# Altium PCB CFD_Chip_Test_v9_forgotOneTermination.PcbDoc (part 2 of 2)
Units mil, origin at the board's own origin, x right, y up, seen from the top; angles counter-clockwise.
Board outline 3410 x 4065 mil, 4 copper layers (Top Layer, Top Plane, Bottom Plane, Bottom Layer), stack 61.356 mil thick; 123 components, 109 nets, 496 pads, 105 vias.
Unrouted connection lines stored in the file: 16.
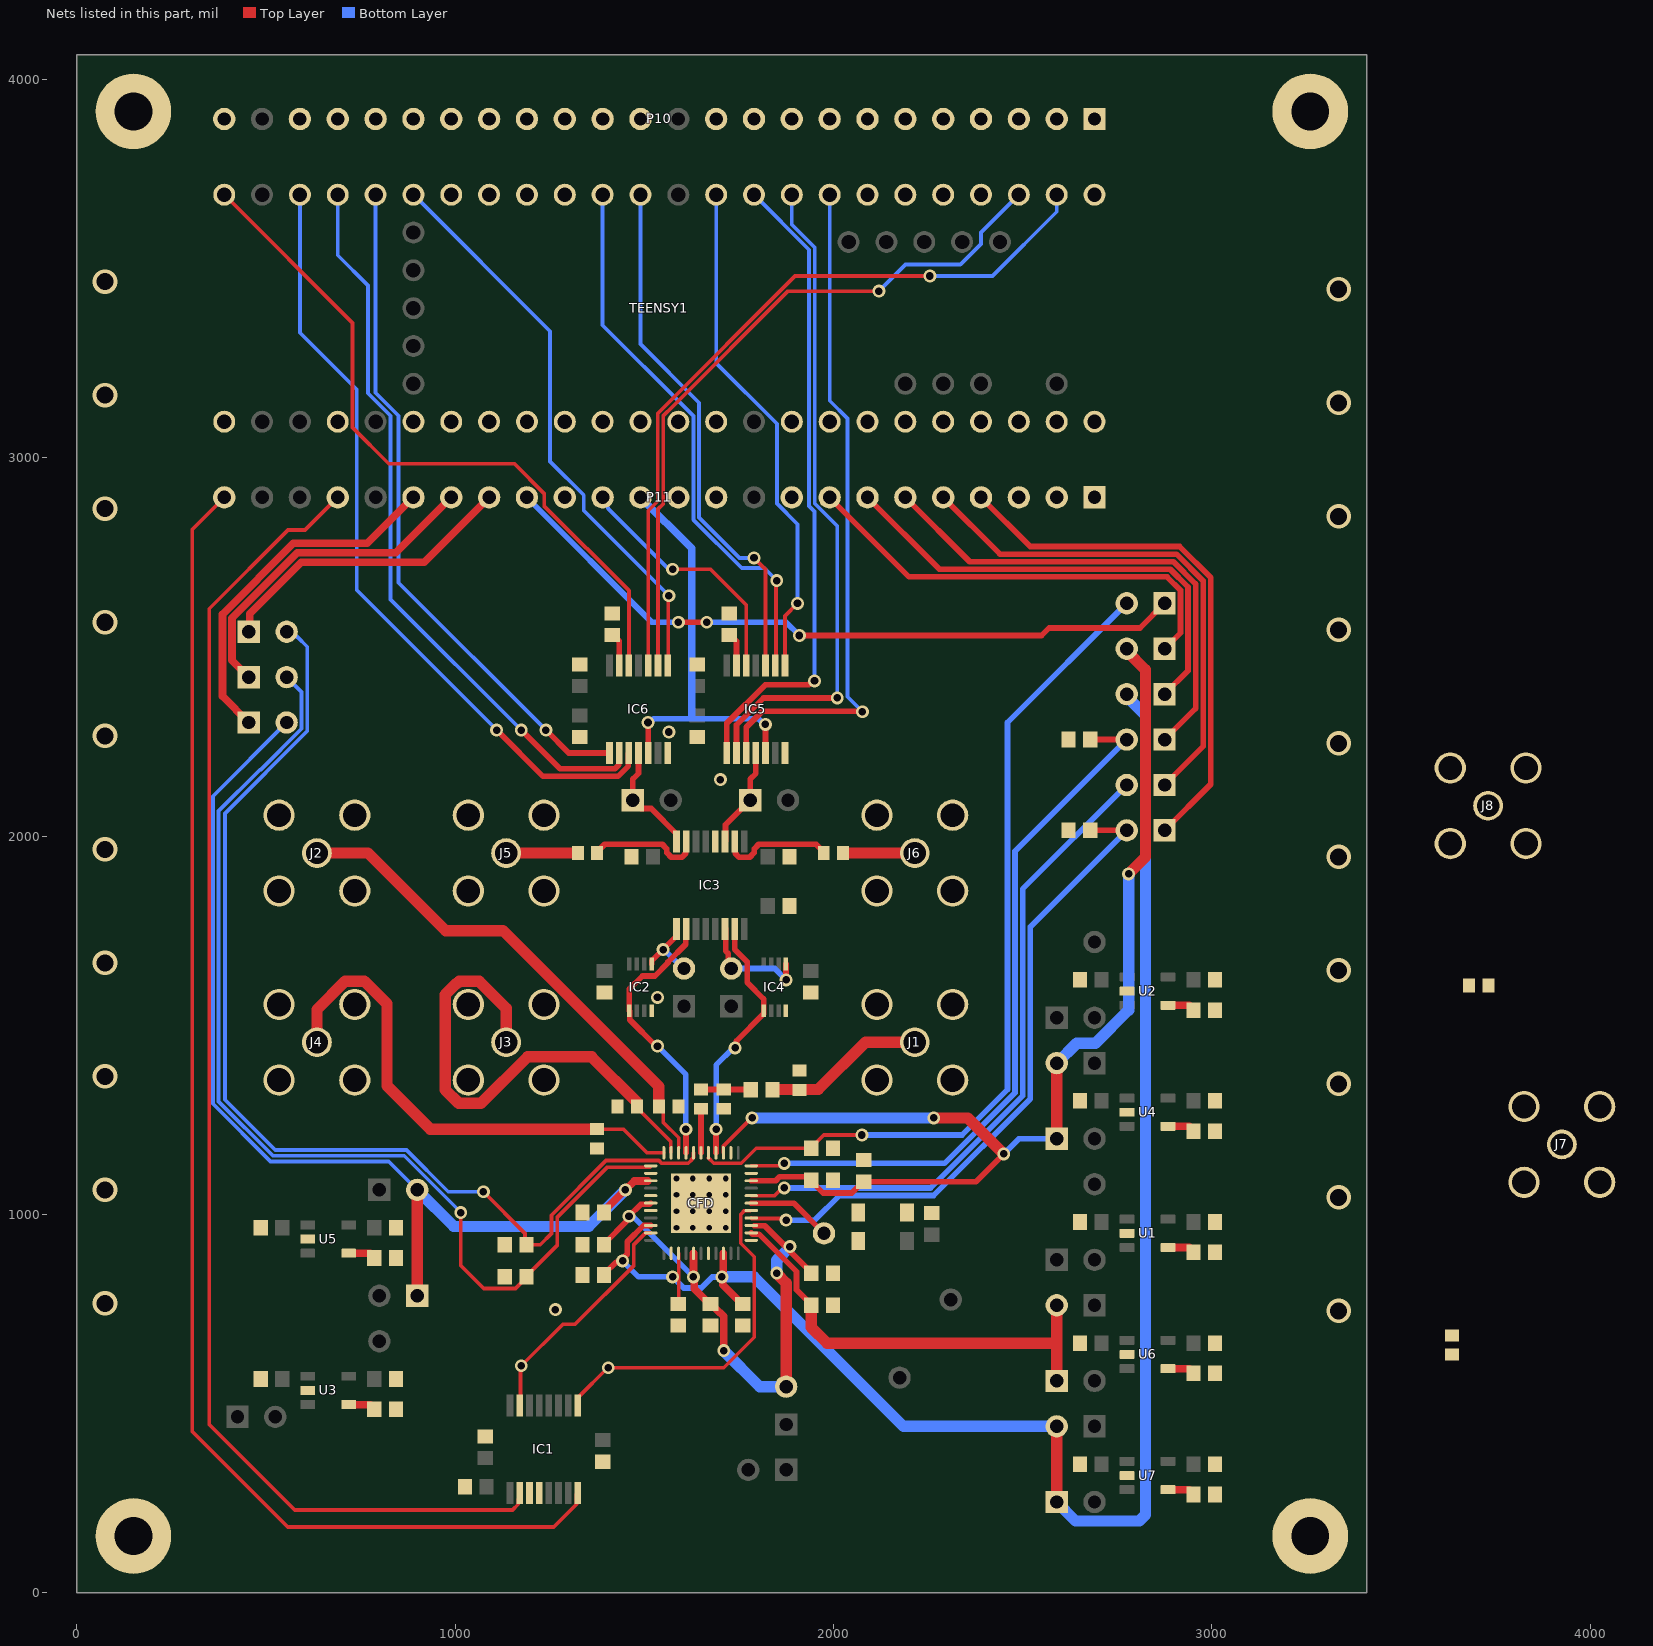
[diagram p4: the nets of this part, all layers, seen from the top]

## Via types
v1: diameter 34, hole 20, Top Layer to Bottom Layer, 69 vias
v2: diameter 65, hole 45, Top Layer to Bottom Layer, 20 vias
v3: diameter 25, hole 15, Top Layer to Bottom Layer, 16 vias

## Nets (pads, with @x,y where several pads share a name; then routed paths per layer and width w, separated by ;. In a path a pad name is that pad's centre, name@x,y a point inside that pad or via, vN(x,y) a via of type N, cw(c..) or ccw(c..) an arc to the next point about the centre after c; other vN are vias at no path point) (continued)
GND: C1.1 C2.2 C3.1 C4.1 C5.1 C6.2 C7.1 C8.1 C9.1 C10.1 C11.1 C12.1 C13.2 C14.2 C15.2 C16.1 C17.1 C18.1 C19.2 C20.1 C21.1 C22.1 C23.2 C24.2 C25.1 C26.1 C27.1 C28.1 C29.1 C30.1 C32.2 C33.2 C34.2 C35.2 C36.2 C37.2 C38.2 C39.2 C40.2 C41.2 C42.2 C43.2 C44.2 C45.2 C46.2 C47.2 C48.2 C49.2 C50.2 C51.2 C52.2 CFD.2 CFD.7 CFD.12 CFD.21 CFD.24 CFD.35 CFD.38 CFD.40 CORNER1.1 CORNER2.1 CORNER3.1 CORNER4.1 D2.2 IC1.11 IC1.12 IC2.4 IC3.12 IC4.4 IC5.7 IC6.7 J1.2 J1.3 J1.4 J1.5 J2.2 J2.3 J2.4 J2.5 J3.2 J3.3 J3.4 J3.5 J4.2 J4.3 J4.4 J4.5 J5.2 J5.3 J5.4 J5.5 J6.2 J6.3 J6.4 J6.5 J7.2 J7.3 J7.4 J7.5 J8.2 J8.3 J8.4 J8.5 P10.1 P11.2 P11.15 R4.1 R5.1 R6.1 R7.1 R8.1 TEENSY1.AGND TEENSY1.GND TEENSY1.GND2 U1.2 U2.2 U3.2 U4.2 U5.2 U6.2 U7.2 | length 4.1
  Top Layer w20: v1@1696.47,2153.52 1698.52,2153.52 v1@1700,2155
  other v1: 1265,748.44 1535,1573.44 1701.04,2148.95 1565,2275
  other v2: 3335,745 75,765 3335,1045 75,1065 3335,1345 75,1365 3335,1645 75,1665 3335,1945 75,1965 3335,2245 75,2265 3335,2545 75,2565 3335,2845 75,2865 3335,3145 75,3165 3335,3445 75,3465
  other v3: 1585.04,965.04 1628.35,965.04 1671.65,965.04 1714.96,965.04 1585.04,1008.35 1628.35,1008.35 1671.65,1008.35 1714.96,1008.35 1585.04,1051.65 1628.35,1051.65 1671.65,1051.65 1714.96,1051.65 1585.04,1094.96 1628.35,1094.96 1671.65,1094.96 1714.96,1094.96
IIN: C31.2 J1.1 R4.2 | length 423.2
  Top Layer w30: C31.2@1838.54,1330 1959.53,1330 2084.53,1455 J1.1@2210,1455
IIN_COUPLE: CFD.28 R3.1 | length 117.1
  Top Layer w15: CFD.28@1650,1162.87 R3.1@1650,1279.41 R3.1@1650,1280
NC_2: P10.4 TEENSY1.2
NC_3: P10.5 TEENSY1.3/CANTX
NC_3V3: P10.15 TEENSY1.3V3
NC_3V3LO: P11.3 TEENSY1.3V3_LO
NC_4: P10.6 TEENSY1.4/CANRX
NC_5: P10.7 TEENSY1.5
NC_24: P10.16 TEENSY1.24
NC_25: P10.17 TEENSY1.25
NC_26: P10.18 TEENSY1.26
NC_A1: P11.12 TEENSY1.15/A1
NC_A2: P11.11 TEENSY1.16/A2
NC_A4: P11.9 TEENSY1.18/A4/SDA
NC_VIN: P11.1 TEENSY1.VIN
NetC15_1: C15.1 IC5.13 | length 92.1
  Top Layer w15: C15.1@1725,2535 1725,2533.43 1743.82,2514.61 IC5.13@1743.82,2450.67
NetC24_1: C24.1 IC6.13 | length 89.1
  Top Layer w15: C24.1@1415,2530 1418.43,2530 1433.82,2514.61 IC6.13@1433.82,2450.67
NetC31_1: C31.1 R3.2 R5.2 | length 135.2
  Top Layer w15: R3.2@1650,1330.59 1650.3,1330.3 1784.7,1330.3 C31.1@1785,1330
NetC38_1: C38.1 U1.4 | length 74
  Top Layer w20: U1.4@2884.13,912.6 2940.83,912.6 2948.43,905 C38.1@2955,905
NetC39_1: C39.1 U2.4 | length 80.2
  Top Layer w20: U2.4@2884.13,1552.6 2940.83,1552.6 2955,1538.43 C39.1@2955,1535
NetC40_1: C40.1 U3.4 | length 78.1
  Top Layer w20: U3.4@719.13,497.6 775.83,497.6 785,488.43 C40.1@785,480
NetC45_1: C45.1 U4.4 | length 80.2
  Top Layer w20: U4.4@2884.13,1232.6 2940.83,1232.6 2955,1218.43 C45.1@2955,1215
NetC46_1: C46.1 U5.4 | length 74
  Top Layer w20: U5.4@719.13,897.6 775.83,897.6 783.43,890 C46.1@790,890
NetC51_1: C51.1 U6.4 | length 74
  Top Layer w20: U6.4@2884.13,592.6 2940.83,592.6 2948.43,585 C51.1@2955,585
NetC52_1: C52.1 U7.4 | length 69
  Top Layer w20: U7.4@2884.13,272.6 2940.83,272.6 2948.43,265 C52.1@2950,265
OUT_MAIN: CFD.26 IC3.7 IC4.1 | length 674.4
  Top Layer w15: CFD.26@1689.37,1162.87 1689.69,1163.19 1689.69,1224.69 v1(1690,1225) ; v1(1740,1440) 1743.64,1443.64 1743.64,1458.52 1815.47,1530.35 1815.47,1569.53 1772.03,1612.97 1772.03,1667.41 1738.98,1700.46 1738.98,1748.98 IC3.7@1740,1750
  Bottom Layer w15: v1(1690,1225) 1690,1395 1735,1440 v1(1740,1440)
OUT_MAIN_33: IC3.10 R2.2 | length 301.8
  Top Layer w15: IC3.10@1738.98,1985.67 1740.33,1984.31 1740.33,1954.33 1750.53,1944.13 1778.6,1944.13 1790.59,1956.12 1790.59,1966.18 1802.58,1978.17 1954.19,1978.17 1975,1957.36 R2.2@1975,1955
OUT_MAIN_TERM_33: J6.1 R2.1 | length 190
  Top Layer w30: R2.1@2025,1955 R2.1@2025.59,1955 J6.1@2215,1955
OUT_SMALL: CFD.30 IC2.1 IC3.2 | length 727.2
  Top Layer w15: v1(1535,1445) 1531.31,1445 1461.75,1514.55 1461.75,1536.71 IC2.1@1460.47,1537.99 1460.47,1595.47 1495.31,1630.31 1528.14,1630.31 1562.97,1665.14 1562.97,1667.41 1609.67,1714.1 IC3.2@1609.67,1744.67 ; v1(1610,1225) 1610.32,1224.68 1610.32,1163.19 CFD.30@1610.63,1162.87
  Bottom Layer w15: v1(1535,1445) 1610,1370 v1(1610,1225)
OUT_SMALL_33: IC3.15 R1.2 | length 301.8
  Top Layer w15: R1.2@1375,1955 1375,1957.36 1395.81,1978.17 1547.42,1978.17 1559.41,1966.18 1559.41,1956.12 1571.4,1944.13 1599.47,1944.13 1609.67,1954.33 1609.67,1984.31 IC3.15@1611.02,1985.67
OUT_SMALL_TERM_33: J5.1 R1.1 | length 190
  Top Layer w30: J5.1@1135,1955 R1.1@1324.41,1955 R1.1@1325,1955
RST_TEST: CFD.16 IC1.1 | length 920.6
  Top Layer w10: IC1.1@1324.57,495.67 1324.57,515.85 1403.72,595 v1(1405,595) 1710,595 1790.67,675.67 1790.67,888.37 1755.16,923.88 1755.16,1000.16 1765,1010 CFD.16@1780,1010
RST_TEST_33: IC1.16 P11.24 TEENSY1.33/A14 | length 3680.1
  Top Layer w10: P11.24@390,2895 305.47,2810.47 305.47,426.48 557.91,174.04 1260.72,174.04 1320.71,234.03 1320.71,260.47 IC1.16@1324.57,264.33
SCAN_CLK: CFD.43 IC1.7 | length 625.8
  Top Layer w10: IC1.7@1171.02,495.67 1173.01,497.66 1173.01,598.01 v1(1175,600) 1284.89,709.89 1316.95,709.89 1472.5,865.44 1472.5,920.44 1503.32,951.26 CFD.43@1517.13,951.26
SCAN_CLK_33: IC1.10 P11.21 TEENSY1.36/A17 | length 3550.1
  Top Layer w10: P11.21@689.57,2894.57 603.53,2808.53 558.32,2808.53 350.47,2600.68 350.47,445.12 576.55,219.04 1152.17,219.04 1167.17,234.03 1167.17,247.17 IC1.10@1170,250
SPI_CLK_MAIN: IC5.12 P11.14 TEENSY1.13/SCK | length 666.2
  Top Layer w10: v1(1575,2705) 1675,2705 1769.7,2610.3 1769.7,2450.96 IC5.12@1769.41,2450.67
  Bottom Layer w10: P11.14@1390,2895 1390,2881.73 1403.99,2867.74 1403.99,2866.01 1560.41,2709.59 1570.41,2709.59 v1(1575,2705)
SPI_CLK_SMALL: IC6.12 P10.24 TEENSY1.32/A13 | length 1881.9
  Top Layer w10: TEENSY1.32/A13@390,3695 729,3356 729,3079.63 824.89,2983.74 1157.16,2983.74 1235.47,2905.43 1235.47,2872.41 1459.41,2648.48 IC6.12@1459.41,2450.67
SPI_DIN_MAIN: IC5.10 P10.13 TEENSY1.11/MOSI | length 1403.6
  Top Layer w10: v1(1790,2735) 1820.59,2704.41 IC5.10@1820.59,2450.67
  Bottom Layer w10: TEENSY1.11/MOSI@1490,3695 1490,3300 1645,3145 1645,2841.82 1751.82,2735 v1(1790,2735)
SPI_DIN_SMALL: IC6.10 P10.2 TEENSY1.0/RX | length 1996.8
  Top Layer w10: IC6.10@1510.59,2450.67 1510.59,2859.69 1535.47,2884.57 1535.47,3116.84 1898.63,3480 v1(2255,3480)
  Bottom Layer w10: v1(2255,3480) 2420,3480 2590,3650 TEENSY1.0/RX@2590,3695
SPI_DOUT_MAIN: IC5.9 P10.14 TEENSY1.12/MISO | length 1471.3
  Top Layer w10: IC5.9@1846.18,2450.67 1848.09,2452.58 1848.09,2673.09 v1(1850,2675)
  Bottom Layer w10: TEENSY1.12/MISO@1390,3695 1390,3350 1606,3134 1606.15,3134 1629,3111.15 1629,3111 1630,3110 1630,2835.6 1757.6,2708 1817,2708 v1(1850,2675)
SPI_DOUT_SMALL: IC6.9 P10.3 TEENSY1.1/TX | length 1865.1
  Top Layer w10: IC6.9@1536.18,2450.67 1536.18,2864.07 1550.47,2878.36 1550.47,3110.47 1551,3111 1551,3111.15 1573.85,3134 1574,3134 1880,3440 v1(2120,3440)
  Bottom Layer w10: v1(2120,3440) 2190.22,3510.22 2335.37,3510.22 2390,3564.85 2390,3595 TEENSY1.1/TX@2490,3695
SPI_INTRPT_MAIN: IC5.8 P10.11 TEENSY1.9/CS | length 1347.2
  Top Layer w10: IC5.8@1871.77,2450.67 1871.77,2581.77 v1(1905,2615)
  Bottom Layer w10: TEENSY1.9/CS@1690,3695 1690,3250.15 1850.47,3089.68 1850.47,2878.63 1905,2824.1 v1(1905,2615)
SPI_INTRPT_SMALL: IC6.8 P10.19 TEENSY1.27 | length 1525.3
  Top Layer w10: IC6.8@1561.77,2450.67 1563.39,2452.28 1563.39,2633.39 v1(1565,2635)
  Bottom Layer w10: TEENSY1.27@890,3695 1251,3334 1251,2989.9 1340,2900.9 1340,2860 v1(1565,2635)
TDC_CLK: IC5.5 IC6.5 P11.13 TEENSY1.14/A0 | length 1113.1
  Top Layer w15: v1(1510,2300) 1510.3,2299.7 1510.3,2219.63 IC6.5@1510.59,2219.33 ; v1(1820,2295) 1820.3,2294.7 1820.3,2219.63 IC5.5@1820.59,2219.33
  Bottom Layer w15: v1(1510,2300) 1515.14,2300 1525.14,2310 1801.71,2310 1816.71,2295 v1(1820,2295)
  Bottom Layer w20: P11.13@1490,2895 1625,2760 1625,2315
TDC_EN_MAIN: IC5.1 P10.10 TEENSY1.8 | length 1708.2
  Top Layer w15: IC5.1@1718.23,2219.33 1718.23,2298.23 1820,2400 1934.86,2400 1944.86,2410 v1(1950,2410)
  Bottom Layer w10: TEENSY1.8@1790,3695 1935.47,3549.53 1935.47,2872.41 1950,2857.89 v1(1950,2410)
TDC_EN_SMALL: IC6.1 P10.20 TEENSY1.28 | length 1794.8
  Top Layer w15: v1(1240,2280) 1300.67,2219.33 IC6.1@1408.23,2219.33
  Bottom Layer w10: TEENSY1.28@790,3695 790,3171.37 850.47,3110.9 850.47,2669.53 v1(1240,2280)
TDC_START_MAIN: J8.1 R9.2 | length 1796.1
  Top Layer w15: 1769.41,2219.33 1769.41,2287.59 1811.82,2330 2075,2330 v1(2076.59,2328.41)
  Bottom Layer w10: 1990,3695 1990,3150.15 2037,3103.15 2037,2368 v1(2076.59,2328.41)
TDC_START_MAIN_IN: IC5.3 R9.1
TDC_START_MAIN_TNSY: P10.8 TEENSY1.6
TDC_START_SMALL: J7.1 R10.2 | length 2075
  Top Layer w15: v1(1110,2280) 1232.2,2157.8 1430.55,2157.8 1458.05,2185.3 1458.05,2217.97 1459.41,2219.33
  Bottom Layer w10: 590,3695 590,3330 740,3180 740,2650 v1(1110,2280)
TDC_START_SMALL_IN: IC6.3 R10.1
TDC_START_SMALL_TNSY: P10.22 TEENSY1.30
TDC_TRIGG_MAIN: IC5.2 P10.9 TEENSY1.7 | length 1749.9
  Top Layer w15: IC5.2@1743.82,2219.33 1743.82,2293.82 1815,2365 v1(2010,2365)
  Bottom Layer w10: TEENSY1.7@1890,3695 1890,3616.21 1950.47,3555.74 1950.47,2878.63 2010,2819.1 v1(2010,2365)
TDC_TRIGG_SMALL: IC6.2 P10.21 TEENSY1.29 | length 1951.8
  Top Layer w15: v1(1175,2280) 1277.2,2177.8 1422.26,2177.8 1432.46,2187.99 1432.46,2217.97 IC6.2@1433.82,2219.33
  Bottom Layer w10: TEENSY1.29@690,3695 690,3535 770,3455 770,3170.15 829.53,3110.63 829.53,2625.47 v1(1175,2280)
TIME_MAIN_18: IC3.6 IC4.5 P12.2 | length 310.8
  Top Layer w15: IC3.6@1715,1755 1715,1696.15 1721.57,1689.58 1721.57,1658.43 P12.2@1730,1650 ; IC4.5@1874.53,1662.01 1874.76,1661.77 1874.76,1620.24 v1(1875,1620)
  Bottom Layer w15: P12.2@1730,1650 1845,1650 v1(1875,1620)
TIME_MAIN_33: IC3.11 IC5.4 P15.1 | length 266.1
  Top Layer w15: IC3.11@1713.39,1985.67 1714.74,1987.03 1714.74,2029.74 1775,2090 P15.1@1780,2090 ; P15.1@1780,2095 1780,2150.59 1795,2165.59 IC5.4@1795,2219.33 IC5.4@1795,2220
TIME_SMALL_18: IC2.5 IC3.1 P14.2 | length 191.7
  Top Layer w15: IC2.5@1519.53,1662.01 1519.53,1669.65 v1@1549.94,1700.06 ; v1(1550,1700) v1@1549.94,1700.06 ; IC3.1@1585,1750 1585,1733.72 1584.07,1732.8 1582.68,1732.8 v1@1549.94,1700.06
  Bottom Layer w15: v1(1550,1700) 1552.5,1700 1602.5,1650 P14.2@1605,1650
TIME_SMALL_33: IC3.16 IC6.4 P13.1 | length 298.8
  Top Layer w15: IC6.4@1485,2215 1485,2165.59 1470,2150.59 P13.1@1470,2095 1492.03,2072.97 1518.31,2072.97 1585.43,2005.85 IC3.16@1585.43,1985.67
VBG_TEST: C25.2 CFD.15 P4.2 | length 1784
  Top Layer w10: CFD.15@1782.87,990.63 1783.94,989.57 1870.43,989.57 v1(1875,985)
  Top Layer w15: C25.2@2678.54,2015 P4.2@2775,2015
  Bottom Layer w15: v1(1875,985) 1950.56,985 2015.56,1050 2264.85,1050 2520,1305.15 2520,1760 P4.2@2775,2015
VBG_TEST_I: P4.1 P11.4 TEENSY1.23/A9 | length 1413.3
  Top Layer w15: P11.4@2390,2895 2520,2765 2914.87,2765 2997.03,2682.84 2997.03,2137.03 P4.1@2875,2015
VDAC_MAIN: C26.2 CFD.22 P5.2 | length 1929.1
  Top Layer w10: CFD.22@1782.87,1128.43 1856.93,1128.43 1863.51,1135 v1(1870,1135)
  Top Layer w15: C26.2@2678.54,2255 P5.2@2775,2255
  Bottom Layer w15: v1(1870,1135) 2293.28,1135 2480,1321.72 2480,1960 P5.2@2775,2255
VDAC_MAIN_IO: P5.1 P11.6 TEENSY1.21/A7 | length 1307
  Top Layer w15: P11.6@2190,2895 2360,2725 2898.3,2725 2957.03,2666.27 2957.03,2337.03 P5.1@2875,2255
VDAC_SMALL: C27.2 CFD.34 P8.2 | length 2843
  Top Layer w10: v1(1015,1005) 1015,865 1075.67,804.33 1159.84,804.33 1195,839.49 C27.2@1195,840 ; C27.2@1188.54,835 1188.54,836.97 1269.82,918.25 1269.82,991.88 1402.94,1125 CFD.34@1515,1125
  Bottom Layer w10: P8.2@555,2420 594.53,2380.47 594.53,2283.63 485.82,2174.92 483.71,2174.92 375,2066.21 375,1298.79 518.79,1155 865.9,1155 1015,1005.9 v1(1015,1005)
VDAC_SMALL_IO: P8.1 P11.18 TEENSY1.39/A20 | length 886
  Top Layer w20: P8.1@455,2420 410.47,2464.53 410.47,2530.62 410.47,2575.83 583.17,2748.53 843.53,2748.53 P11.18@990,2895
VDDAON: C20.2 C21.2 C22.2 CFD.3 CFD.9 CFD.42 P2.2 P26.2 P28.1 | length 4484
  Top Layer w10: C21.2@1590.94,770 CFD.3@1590.94,897.13
  Top Layer w15: C22.2@1396.57,845 1425.32,873.74 1438.98,873.74 v1(1442.62,877.38) ; v1@1440,880 1440.1,880 1455,894.9 1455,927.69 1498.26,970.94 CFD.42@1517.13,970.94
  Top Layer w20: CFD.9@1709.06,897.13 1709.06,842.84 1705,838.79 v1(1705,835) 1707.68,832.32 1707.68,813.9 1758.03,763.54 C20.2@1760,763.54
  Top Layer w30: P28.1@2590,240 P26.2@2590,440
  Bottom Layer w15: v1(1442.62,877.38) 1485,835 v1(1575,835) 1604.5,805.5 1650.5,805.5 1679.57,834.57 1704.57,834.57 v1(1705,835)
  Bottom Layer w30: v1(1705,835) 1790,835 2185,440 P26.2@2590,440 ; P28.1@2590,240 2640,190 2808.28,190 2824.53,206.24 2824.53,2319.13 2775,2368.66 P2.2@2775,2375
VDDAON_I: P2.1 P11.7 TEENSY1.20/A6 | length 1253.9
  Top Layer w15: P11.7@2090,2895 2280,2705 2890.02,2705 2937.03,2657.99 2937.03,2437.03 P2.1@2875,2375
VDDHV: C16.2 C17.2 C18.2 CFD.5 CFD.14 CFD.39 P19.2 | length 1498.3
  Top Layer w15: C16.2@1393.54,920 1393.54,921.97 1456.05,984.48 1456.05,991.67 v1(1459.69,995.31) ; v1@1460,995 1460,995.62 1491.13,1026.75 1513.88,1026.75 CFD.39@1517.13,1030 ; CFD.14@1790.94,970 1818.43,970 1941.46,846.97 C18.2@1941.46,845
  Top Layer w20: CFD.5@1630.32,897.13 1630.16,896.97 1630.16,835.16 v1(1630,835) 1632.68,832.32 1632.68,803.9 C17.2@1669.47,767.1 ; C17.2@1675,763.54 1676.97,763.54 1699.81,740.7 1701.34,740.7 1710.67,731.37 1710.67,640.67 v1(1710,640)
  Top Layer w30: v1(1850,845) 1850,843.92 1875,818.92 P19.2@1875,545
  Bottom Layer w15: v1(1459.69,995.31) 1463.33,991.67 1473.33,991.67 v1(1630,835)
  Bottom Layer w20: P19.2@1870,545 P19.2@1875,540
  Bottom Layer w30: v1(1710,640) 1805,545 P19.2@1870,545 ; v1@1850,850 1850,878.92 1885,913.92 v1(1885,915)
VDDMAIN: C11.2 C12.2 CFD.20 CFD.25 P7.2 P20.2 P22.1 | length 3152.3
  Top Layer w10: CFD.25@1709.06,1162.87 1709.06,1180.79 1783.27,1255 v1(1785,1255)
  Top Layer w15: CFD.20@1782.87,1089.06 1847.34,1089.06 1857.78,1099.5 1935.5,1099.5 C11.2@1940,1095 ; C11.2@1941.46,1090 1941.46,1088.03 1972.66,1056.83 2048.41,1056.83 2075,1083.43 C12.2@2075,1085 ; C12.2@2080,1086.46 2376.46,1086.46 v1(2450,1160)
  Top Layer w30: v1(2265,1255) 2355,1255 v1(2450,1160) ; P22.1@2590,1200 P20.2@2590,1400 ; P7.2@2775,2495 2775,2488.66 2824.53,2439.13 2824.53,1944.53 v1(2780,1900)
  Bottom Layer w15: v1(2450,1160) 2490,1200 P22.1@2590,1200
  Bottom Layer w30: v1(1785,1255) v1(2265,1255) ; P20.2@2590,1400 2590.35,1400 2642.88,1452.52 2692.56,1452.52 2780,1539.96 v1(2780,1900)
VDDMAIN_I: P7.1 P11.8 TEENSY1.19/A5/SCL | length 1200.7
  Top Layer w15: P11.8@1990,2895 2200,2685 2881.73,2685 2917.03,2649.71 2917.03,2537.03 P7.1@2875,2495
VDDSMALL: C5.2 CFD.36 P9.2 P21.2 P23.1 | length 2781.2
  Top Layer w20: C5.2@1395,1008.43 1402.24,1015.67 1402.24,1017.24 v1(1450,1065) 1473.31,1088.31 CFD.36@1509.41,1088.31
  Top Layer w30: P23.1@900,785 P21.2@900,1065
  Bottom Layer w10: P9.2@555,2300 360,2105 360,1292.57 512.57,1140 825,1140 P21.2@900,1065
  Bottom Layer w30: P21.2@900,1065 997,968 1353,968 v1(1450,1065)
VDDSMALL_IO: P9.1 P11.19 TEENSY1.38/A19 | length 947.4
  Top Layer w20: P9.1@455,2300 385.47,2369.53 385.47,2540.97 385.47,2586.18 572.82,2773.53 768.53,2773.53 P11.19@890,2895
VDDTEST: C6.1 CFD.13 P25.2 P27.1 | length 1190.8
  Top Layer w15: CFD.13@1782.87,951.26 1786.12,948.01 1803.46,948.01 1902.5,848.97 1902.5,800.93 1940,763.43 C6.1@1940,760
  Top Layer w30: C6.1@1941.46,760 1941.46,701.46 1982.91,660 2590,660 ; P27.1@2590,560 2590,660 ; P25.2@2590,760 2590,660
VIN_TEST: CFD.17 D1.2 D2.1 P32.1 | length 225.3
  Top Layer w15: CFD.17@1782.87,1030 1895,1030 P32.1@1975,950
VINN_ZCD_SMALL: CFD.32 J3.1 R7.2 | length 1332.2
  Top Layer w10: R7.2@1480.59,1285 1480.59,1282.05 1570,1192.64 CFD.32@1570,1165
  Top Layer w30: J3.1@1135,1455 1135,1545 1063.66,1616.34 1011.34,1616.34 1005.87,1610.87 1004.13,1610.87 973.66,1580.41 973.66,1329.59 1009.59,1293.66 1068.66,1293.66 1191.34,1416.34 1360.8,1416.34 1480,1297.14 R7.2@1480,1290
VINP_LED_SMALL: CFD.31 J2.1 R6.2 | length 1343.6
  Top Layer w10: R6.2@1539.41,1285 1550.16,1274.25 1550.16,1243.31 1590.94,1202.52 CFD.31@1590.94,1175.59
  Top Layer w30: J2.1@635,1955 770,1955 975,1750 1126.75,1750 1538.66,1338.08 1538.66,1286.34 R6.2@1540,1285
VINP_ZCD_SMALL: CFD.33 J4.1 R8.2 | length 1348.2
  Top Layer w10: R8.2@1375,1225 1444.9,1225 1507.03,1162.87 CFD.33@1551.57,1162.87
  Top Layer w30: J4.1@635,1455 635,1541.75 709.59,1616.34 760.41,1616.34 820,1556.75 820,1340 934.41,1225.59 R8.2@1374.41,1225.59
VOUT_TEST: CFD.18 P1.2 | length 1759.8
  Top Layer w10: CFD.18@1782.87,1049.69 1845.06,1049.69 1865.38,1070 v1(1870,1070)
  Bottom Layer w15: v1(1870,1070) 2256.57,1070 2500,1313.43 2500,1860 2770,2130 P1.2@2770,2135
VOUT_TEST_I: P1.1 P11.5 TEENSY1.22/A8 | length 1360.2
  Top Layer w15: P11.5@2290,2895 2440,2745 2906.59,2745 2977.03,2674.56 2977.03,2237.03 P1.1@2875,2135
VREF_ATTEN: C29.2 CFD.27 P3.2 | length 2294.2
  Top Layer w10: CFD.27@1670,1150 1670,1148.75 1683.6,1135.16 1756.12,1135.16 1795.96,1175 C29.2@1941.46,1175 1941.46,1176.97 1974.49,1210 v1(2075,1210)
  Bottom Layer w15: v1(2075,1210) 2340,1210 2460,1330 2460,2300 P3.2@2775,2615
VREF_ATTEN_O: P3.1 P11.16 TEENSY1.A22/DAC1 | length 1871.4
  Top Layer w15: v1(1590.39,2565) v1(1665,2565) ; v1(1910,2530) 2550,2530 2570,2550 2810,2550 P3.1@2875,2615
  Bottom Layer w15: P11.16@1190,2895 1520,2565 v1(1590.39,2565) ; v1(1665,2565) 1875,2565 v1(1910,2530)
VREF_PREAMP: C28.2 CFD.29 P6.2 | length 2913.8
  Top Layer w10: v1(1075,1060) 1185.19,949.81 1185.19,923.35 C28.2@1188.54,920 1190,920 1225,920 1254.82,949.82 1254.82,998.09 1399.09,1142.36 1538.6,1142.36 1545.8,1135.16 1616.4,1135.16 1624.57,1143.32 1624.57,1145.47 1630.32,1151.22 CFD.29@1630.32,1162.87
  Bottom Layer w10: P6.2@555,2540 568.27,2540 582.26,2526.01 583.99,2526.01 609.53,2500.47 609.53,2277.41 392.11,2060 392.11,1302.89 525,1170 872.11,1170 982.11,1060 v1(1075,1060)
VREF_PREAMP_IO: P6.1 P11.17 TEENSY1.21/DAC0 | length 808.4
  Top Layer w20: P6.1@455,2540 457.81,2542.81 457.81,2587.81 593.53,2723.53 918.53,2723.53 P11.17@1090,2895
pads on no net: CFD.4 CFD.6 CFD.8 CFD.10 CFD.11 CFD.19 CFD.23 CFD.37 IC1.6 IC5.6 IC6.6 TEENSY1.3V3_2 TEENSY1.A10 TEENSY1.A11 TEENSY1.AREF TEENSY1.GND3 TEENSY1.PROG TEENSY1.RESET TEENSY1.U5V TEENSY1.UD+ TEENSY1.UD- TEENSY1.UGND1 TEENSY1.UGND2 TEENSY1.VBAT TEENSY1.VUSB

## Polygon pours and split planes (outlines as drawn)
GND on Bottom Layer "NONET_L-01_P-001" (solid, remove dead copper, shelved, pour order 0): 0,4065 0,0 3410,0 3410,4065
GND on Top Layer "NONET_L-01_P-001" (solid, remove dead copper, shelved, pour order 1): 0,4065 3410,4065 3410,0 0,0
GND on Bottom Plane (split plane): 3389.9,20.1 20.1,20.1 20.1,4044.9 3389.9,4044.9
GND on Top Plane (split plane): 3389.9,20.1 20.1,20.1 20.1,4044.9 3389.9,4044.9

## Other copper
Top Layer:
  rectangle net VDDAON: 1555,815 1595,855
  rectangle net +3.3VD: 1655,1945 1670,1970
  rectangle net +1.8VD: 1450,1645 1485,1680
  rectangle net NC_VIN: 2665,2887.5 2715,3092.5
  rectangle net GND: 2565,2887.5 2615,3092.5
  rectangle net NC_3V3LO: 2465,2887.5 2515,3092.5
  rectangle net VBG_TEST_I: 2365,2887.5 2415,3092.5
  rectangle net VOUT_TEST_I: 2265,2887.5 2315,3092.5
  rectangle net VDAC_MAIN_IO: 2165,2887.5 2215,3092.5
  rectangle net VDDAON_I: 2065,2887.5 2115,3092.5
  rectangle net VDDMAIN_I: 1965,2887.5 2015,3092.5
  rectangle net NC_A4: 1865,2887.5 1915,3092.5
  rectangle net /RST_TIME: 1765,2890 1815,3095
  rectangle net NC_A2: 1665,2890 1715,3095
  rectangle net NC_A1: 1565,2890 1615,3095
  rectangle net TDC_CLK: 1465,2885 1515,3090
  rectangle net SPI_CLK_MAIN: 1365,2890 1415,3095
  rectangle net GND: 1265,2887.5 1315,3092.5
  rectangle net SCAN_CLK_33: 665,2887.5 715,3092.5
  rectangle net /SCAN_LOAD_33: 565,2887.5 615,3092.5
  rectangle net /SCAN_IN_33: 465,2887.5 515,3092.5
  rectangle net RST_TEST_33: 365,2887.5 415,3092.5
  rectangle net GND: 2665,3695 2715,3895
  rectangle net SPI_DOUT_SMALL: 2465,3695 2515,3895
  rectangle net SPI_DIN_SMALL: 2565,3695 2615,3895
  rectangle net NC_2: 2365,3680 2415,3880
  rectangle net NC_3: 2265,3705 2315,3905
  rectangle net NC_4: 2165,3690 2215,3890
  rectangle net NC_5: 2065,3690 2115,3890
  rectangle net TDC_START_MAIN: 1965,3695 2015,3895
  rectangle net TDC_TRIGG_MAIN: 1865,3690 1915,3890
  rectangle net TDC_EN_MAIN: 1765,3695 1815,3895
  rectangle net SPI_INTRPT_MAIN: 1665,3695 1715,3895
  rectangle net /SPI_CS_MAIN: 1565,3700 1615,3900
  rectangle net SPI_DIN_MAIN: 1465,3690 1515,3890
  rectangle net SPI_DOUT_MAIN: 1365,3695 1415,3895
  rectangle net NC_3V3: 1265,3700 1315,3900
  rectangle net NC_24: 1165,3695 1215,3895
  rectangle net NC_25: 1065,3695 1115,3895
  rectangle net TDC_EN_SMALL: 765,3695 815,3895
  rectangle net SPI_INTRPT_SMALL: 865,3695 915,3895
  rectangle net NC_26: 965,3695 1015,3895
  rectangle net TDC_START_SMALL: 565,3695 615,3895
  rectangle net TDC_TRIGG_SMALL: 665,3695 715,3895
  rectangle net /SPI_CS_SMALL: 465,3695 515,3895
  rectangle net SPI_CLK_SMALL: 365,3695 415,3895
  rectangle net +3.3VCHIP: 2300,170 2435,565
  rectangle net +3.3VD: 1410,2335 1625,2380
  region net +3.3VD_SHIFT: 1065,275 1065,355 1255,355 1255,290 1240,290 1240,330 1100,330 1100,275
  region net +1.8VD_SHIFT: 1215,525 1255,525 1255,425 1410,425 1410,390 1215,390
  region net VIN_TEST: 1975,925 2080,925 2080,995 2050,995 2050,975 1975,975
  region net VDDTEST: 2580,735 2506.25,661.25 2580,587.5
  region net +3.3VD: 1615,1915 1662.5,1962.5 1710,1915
  region net +3.3VPSU: 2505,855 2615,855 2615,905 2530,905 2530,1495 2615,1495 2615,1545 2505,1545
  region net +3.3VD: 1620,2415 1660,2415 1660,2380 1710,2380 1710,2425 1725,2425 1725,2335 1710,2335 1660,2335 1660,2300 1620,2300
  region net +3.3VD: 1310,2415 1350,2415 1350,2380 1400,2380 1400,2425 1415,2425 1415,2335 1400,2335 1350,2335 1350,2300 1310,2300
  region net +1.8VD: 1655,1730 1695,1730 1695,1795 1845,1795 1845,1835 1655,1835
Bottom Layer:
  rectangle net GND: 1565,945 1735,1115
  rectangle net NC_VIN: 2665,2910 2715,3110
  rectangle net GND: 2565,2890 2615,3090
  rectangle net NC_3V3LO: 2465,2905 2515,3105
  rectangle net VBG_TEST_I: 2365,2895 2415,3095
  rectangle net VOUT_TEST_I: 2265,2895 2315,3095
  rectangle net VDAC_MAIN_IO: 2165,2890 2215,3090
  rectangle net VDDAON_I: 2065,2890 2115,3090
  rectangle net VDDMAIN_I: 1965,2895 2015,3095
  rectangle net NC_A4: 1865,2895 1915,3095
  rectangle net /RST_TIME: 1765,2895 1815,3095
  rectangle net NC_A2: 1665,2905 1715,3105
  rectangle net NC_A1: 1565,2885 1615,3085
  rectangle net TDC_CLK: 1465,2900 1515,3100
  rectangle net SPI_CLK_MAIN: 1365,2890 1415,3090
  rectangle net VREF_ATTEN_O: 1165,2895 1215,3095
  rectangle net VREF_PREAMP_IO: 1065,2895 1115,3095
  rectangle net VDAC_SMALL_IO: 965,2895 1015,3095
  rectangle net VDDSMALL_IO: 865,2895 915,3095
  rectangle net /SCAN_OUT_33: 765,2895 815,3095
  rectangle net SCAN_CLK_33: 665,2895 715,3095
  rectangle net /SCAN_LOAD_33: 565,2895 615,3095
  rectangle net /SCAN_IN_33: 465,2895 515,3095
  rectangle net RST_TEST_33: 365,2885 415,3085
  rectangle net SPI_CLK_SMALL: 365,3695 415,3895
  rectangle net /SPI_CS_SMALL: 465,3695 515,3895
  rectangle net TDC_TRIGG_SMALL: 665,3695 715,3895
  rectangle net TDC_START_SMALL: 565,3695 615,3895
  rectangle net NC_26: 965,3695 1015,3895
  rectangle net SPI_INTRPT_SMALL: 865,3695 915,3895
  rectangle net TDC_EN_SMALL: 765,3695 815,3895
  rectangle net NC_24: 1165,3695 1215,3895
  rectangle net NC_3V3: 1265,3700 1315,3900
  rectangle net SPI_DOUT_MAIN: 1365,3695 1415,3895
  rectangle net NC_25: 1065,3695 1115,3895
  rectangle net SPI_DIN_MAIN: 1465,3690 1515,3890
  rectangle net /SPI_CS_MAIN: 1565,3700 1615,3900
  rectangle net SPI_INTRPT_MAIN: 1665,3695 1715,3895
  rectangle net TDC_EN_MAIN: 1765,3695 1815,3895
  rectangle net TDC_TRIGG_MAIN: 1865,3690 1915,3890
  rectangle net TDC_START_MAIN: 1965,3695 2015,3895
  rectangle net NC_5: 2065,3690 2115,3890
  rectangle net NC_4: 2165,3690 2215,3890
  rectangle net NC_3: 2265,3705 2315,3905
  rectangle net NC_2: 2365,3680 2415,3880
  rectangle net SPI_DIN_SMALL: 2565,3695 2615,3895
  rectangle net SPI_DOUT_SMALL: 2465,3695 2515,3895
  rectangle net GND: 2665,3695 2715,3895
  region net TDC_CLK: 1552.5,2305 1626.25,2378.75 1700,2305
  region net +1.8VPSU: 2690,210 2800,210 2800,1230 2690,1230 2690,1170 2760,1170 2760,590 2690,590 2690,530 2760,530 2760,270 2690,270

## Silkscreen, mask and mechanical layers (free items; w line width, h text height)
Top Overlay:
  text "GND" at 3350,3505.01 h30 r90
  text "GND" at 60,3404.99 h30 r270
  text "USB -->" at 1925.07,3360.01 h60
  text "GND" at 3350,3205.01 h30 r90
  text "GND" at 60,3104.99 h30 r270
  text "MEASUREMENT / JUMPERS" at 202.02,2959.83 h60 r270
  text "GND" at 3350,2905.01 h30 r90
  text "GND" at 60,2804.99 h30 r270
  text "GND" at 3350,2605 h30 r90
  text "GND" at 60,2504.99 h30 r270
  text "GND" at 3350,2305.01 h30 r90
  text "GND" at 60,2204.99 h30 r270
  text "GND" at 3350,2005.01 h30 r90
  text "GND" at 60,1904.99 h30 r270
  text "MEASUREMENT / JUMPERS" at 3112.98,1745.18 h60 r90
  text "GND" at 3350,1705.01 h30 r90
  text "GND" at 60,1604.99 h30 r270
  text "VD" at 3219.99,1555.02 h60 r90
  text "GND" at 3350,1405.01 h30 r90
  text "LDO" at 2755,1395 h20
  text "GND" at 60,1304.99 h30 r270
  text "MAIN" at 3219.99,1180.03 h60 r90
  text "PSU" at 2755,1160 h20
  text "GND" at 3350,1105.01 h30 r90
  text "SMALL" at 280.01,1079.95 h60 r270
  text "LDO" at 676.68,1055 h20
  text "GND" at 60,1004.99 h30 r270
  text "VA" at 3219.99,915.02 h60 r90
  text "GND" at 3350,805.01 h30 r90
  text "PSU" at 676.68,775 h20
  text "LDO" at 2755,755 h20
  text "GND" at 60,704.99 h30 r270
  text "LVL" at 280.01,629.97 h60 r270
  text "CHIP_33" at 1945,536.67 h20
  text "TEST" at 3219.99,535.04 h60 r90
  text "PSU" at 2755,520 h20
  text "PSU_33" at 1945,436.67 h20
  text "LDO" at 2755,435 h20
  text "BOARD_33" at 1555,316.67 h20
  text "PSU_33" at 1945,316.67 h20
  text "AON" at 3219.99,255.03 h60 r90
  text "PSU" at 2755,200 h20
  text "+3.3VPSU" at 1762.54,60 h30
  text "GND" at 2730.01,60 h30
  text "GND" at 3030.01,60 h30